# EAGLE board Adapter-SOIC-08 (EAGLE 5.06)
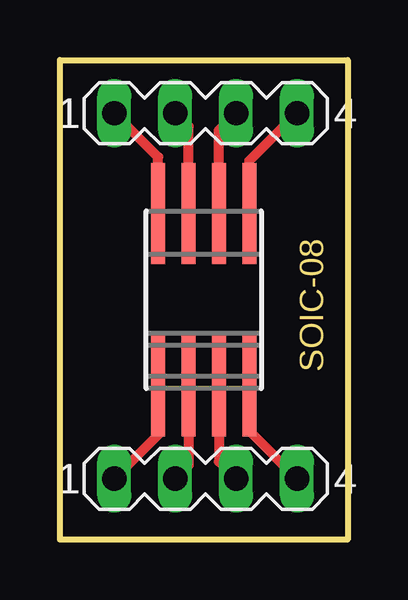
[diagram p0: board, top side]
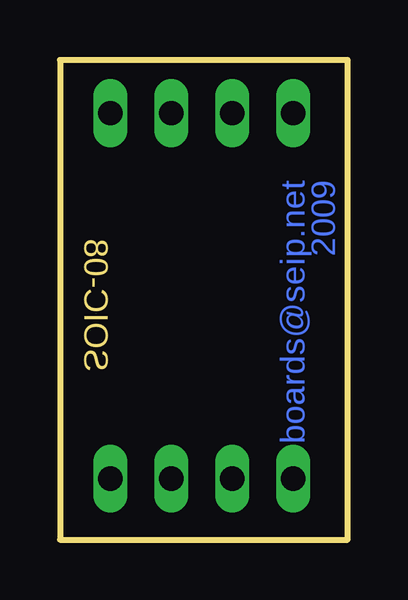
[diagram p1: board, bottom side, seen from below]

Size 12 x 20 mm. Coordinates in mm from the lower left corner, seen from the top.
Outline: 0,0 0,20 12,20 12,0 0,0
Copper layers (1*16): Top 0.035mm / dielectric 1.5mm / Bottom 0.035mm
Design rules "PCB-POOL": minimum track width 6mil, minimum drill 12mil, track to track 6mil, track to pad 6mil, pad to pad 6mil, via to via 6mil, smd to smd 6mil, copper to edge 20mil, drill to drill 8mil, minimum pad ring 8mil, minimum via ring 6mil, stop-mask expansion 3mil, vias tented up to drill 0mil, thermal gap 8mil

## Footprints (pad centres in the part's own frame; a part is rotated, then mirrored left to right if it is on the bottom)
SO8 = smd 0.6 x 2.2: 1 -1.905,-2.6; 2 -0.635,-2.6; 3 0.635,-2.6; 4 1.905,-2.6; 5 1.905,2.6; 6 0.635,2.6; 7 -0.635,2.6; 8 -1.905,2.6
SO08W = smd 0.6 x 2.2: 1 -1.905,-4.6; 2 -0.635,-4.6; 3 0.635,-4.6; 4 1.905,-4.6; 5 1.905,4.6; 6 0.635,4.6; 7 -0.635,4.6; 8 -1.905,4.6
MA04-1 = drill 1.016 long: 1 -3.81,0; 2 -1.27,0; 3 1.27,0; 4 3.81,0

## Placement (x,y rotation side)
E$2  [SO8]  6,10 0 top
E$3  [SO08W]  6,10 0 top
E$4  [MA04-1]  6.08,17.78 0 top
E$5  [MA04-1]  6.08,2.54 0 top

## Library data of the parts
E$2 E$3 = ref-packages
E$4 E$5 = con-lstb

## Nets
S$1: E$3.8 E$4.1
S$2: E$3.7 E$4.2
S$3: E$3.6 E$4.3
S$4: E$3.5 E$4.4
S$5: E$3.1 E$5.1
S$6: E$3.2 E$5.2
S$7: E$3.3 E$5.3
S$8: E$3.4 E$5.4

## Tracks (layer width: path | path; a pad name or v marks a point on that pad's centre or on a via)
S$1
  Top 0.406: E$3.8 4.09,15.96 E$4.1
S$2
  Top 0.406: E$3.7 5.37,17.23 E$4.2
S$3
  Top 0.406: E$3.6 6.63,17.07 E$4.3
S$4
  Top 0.406: E$3.5 7.91,15.79 E$4.4
S$5
  Top 0.406: E$3.1 4.09,4.37 E$5.1
S$6
  Top 0.406: E$3.2 5.37,3.1 E$5.2
S$7
  Top 0.406: E$3.3 6.63,3.25 E$5.3
S$8
  Top 0.406: E$3.4 7.91,4.53 E$5.4

## Text on the board
Bottom: 2009 | boards@seip.net
Dimension: SOIC-08